# Altium PCB smart_charger_pcb.PcbDoc (part 1 of 2)
Units mm, origin at the board's own origin, x right, y up, seen from the top; angles counter-clockwise.
Board outline 250 x 183.13 mm, 4 copper layers (Top Layer, Ground, Power, Bottom Layer); 179 components, 118 nets, 581 pads, 0 vias.
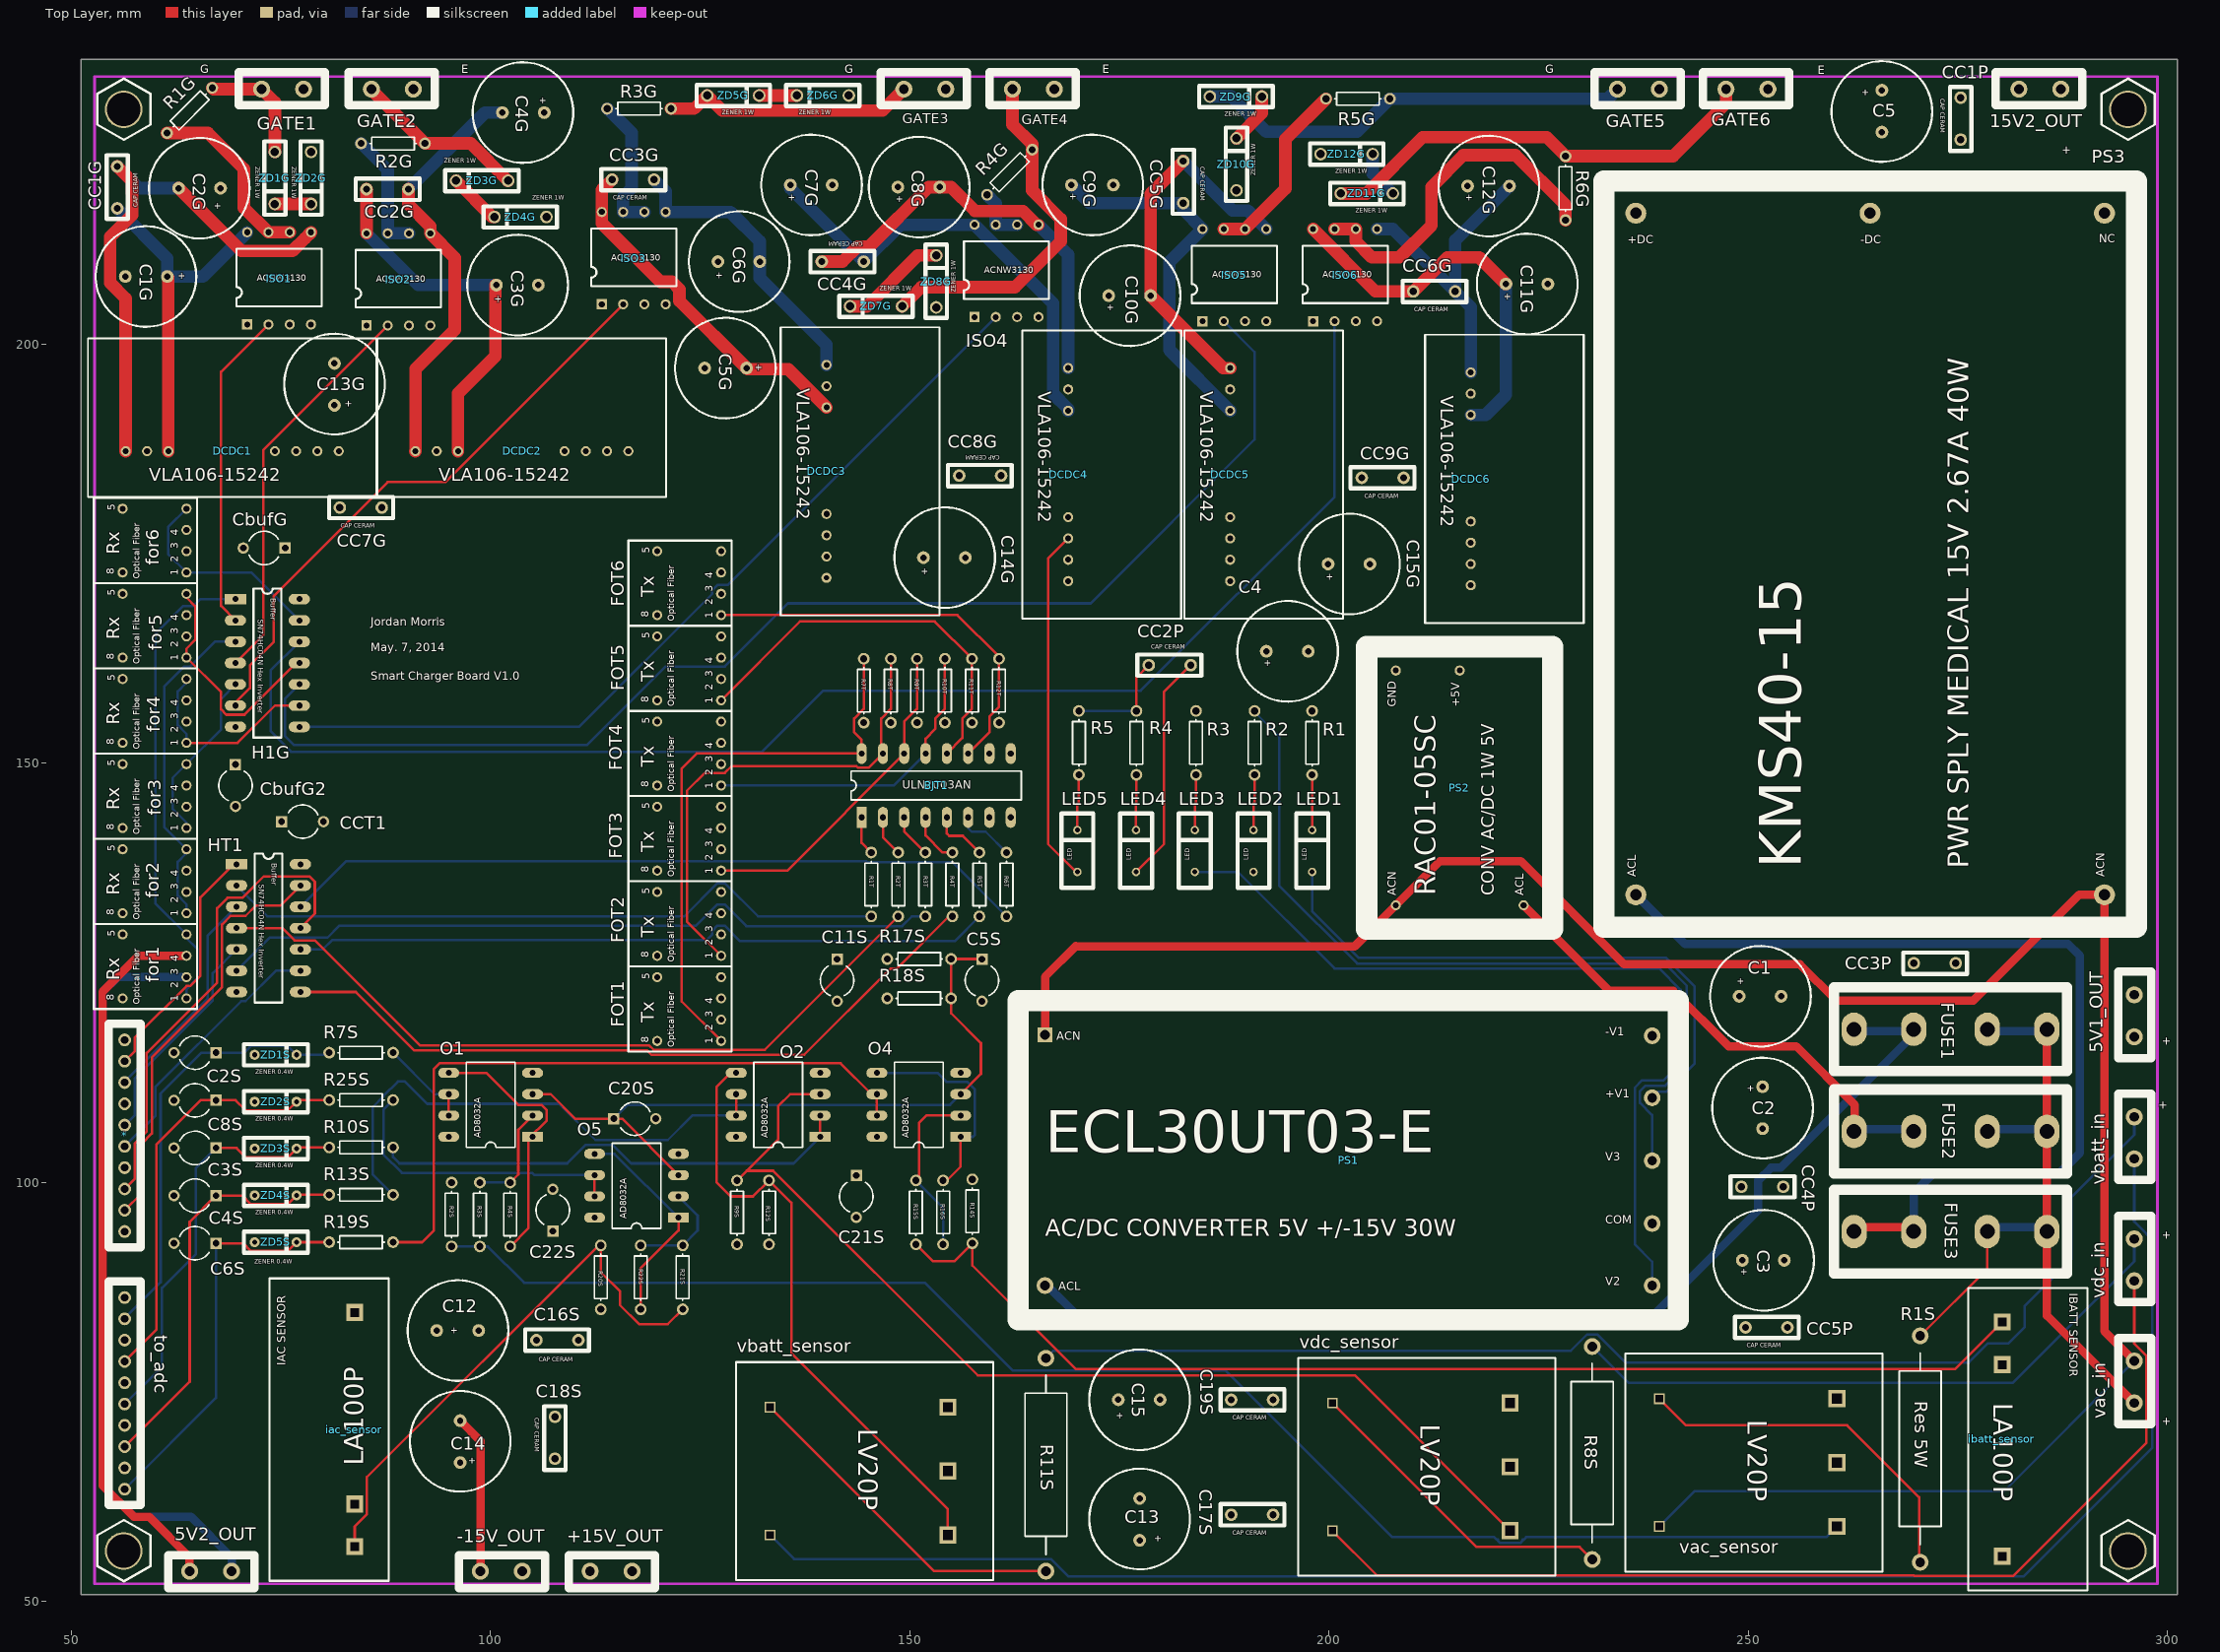
[diagram p0: Top Layer view]
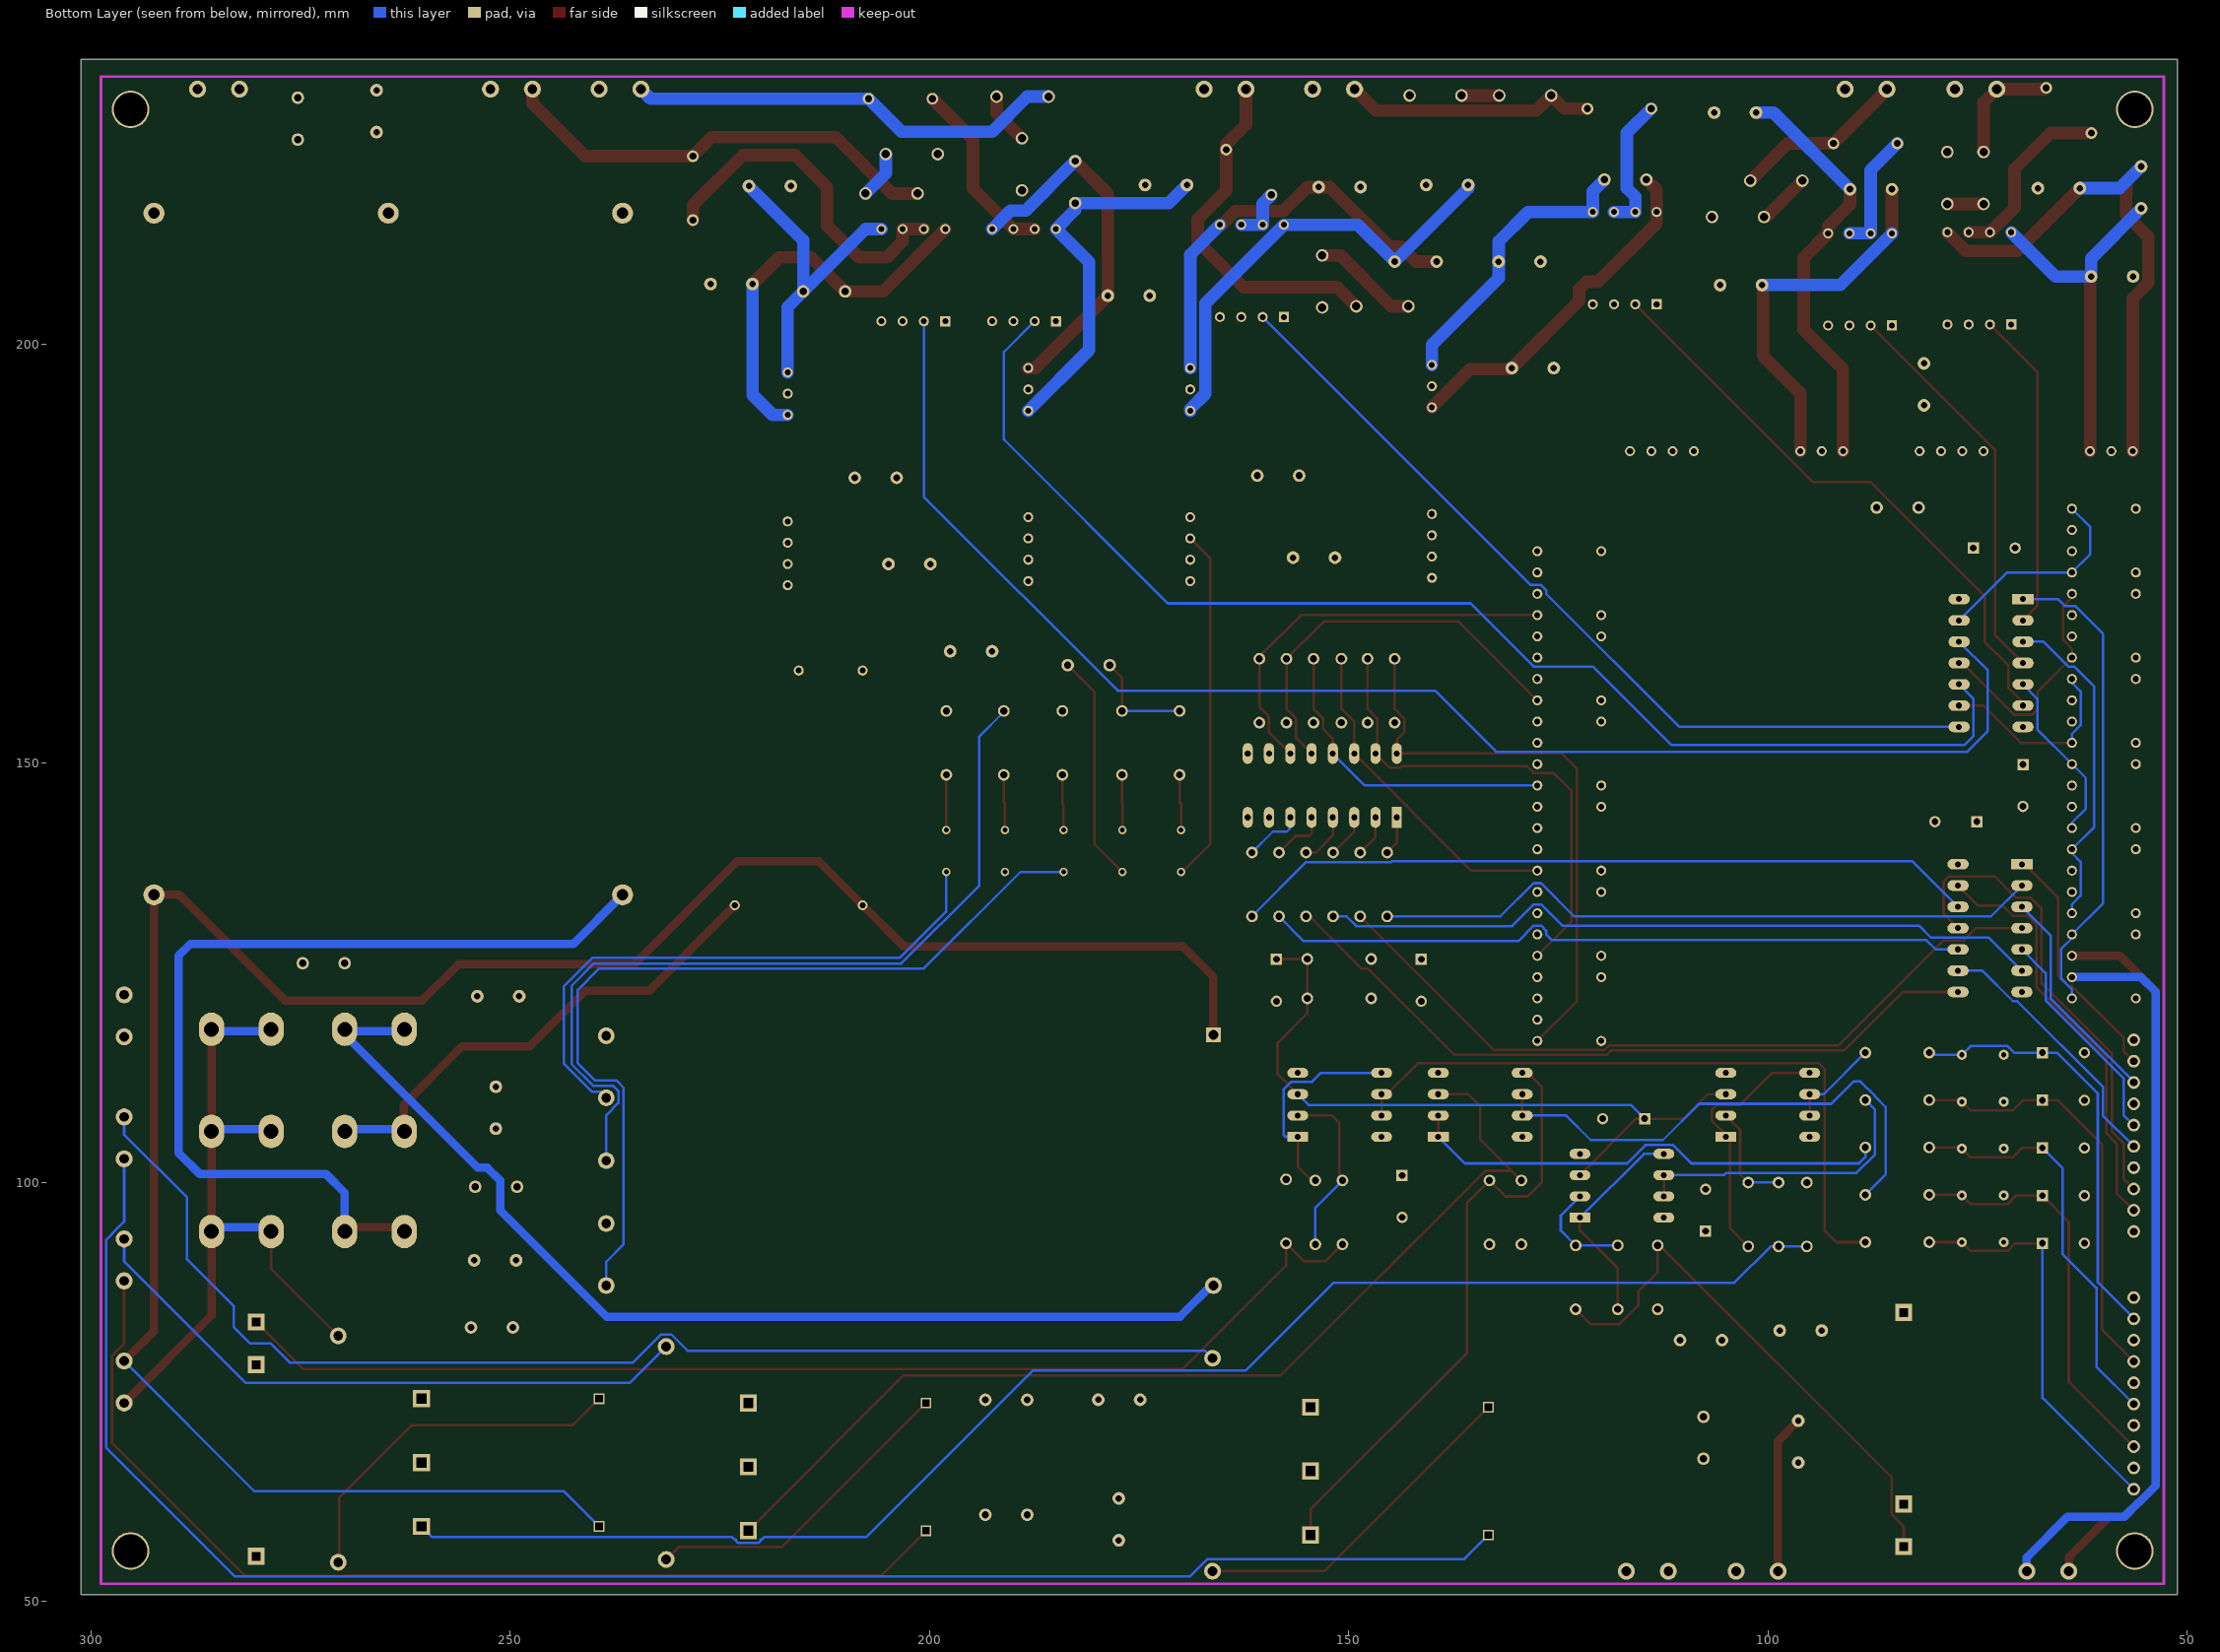
[diagram p1: Bottom Layer view, seen from below]
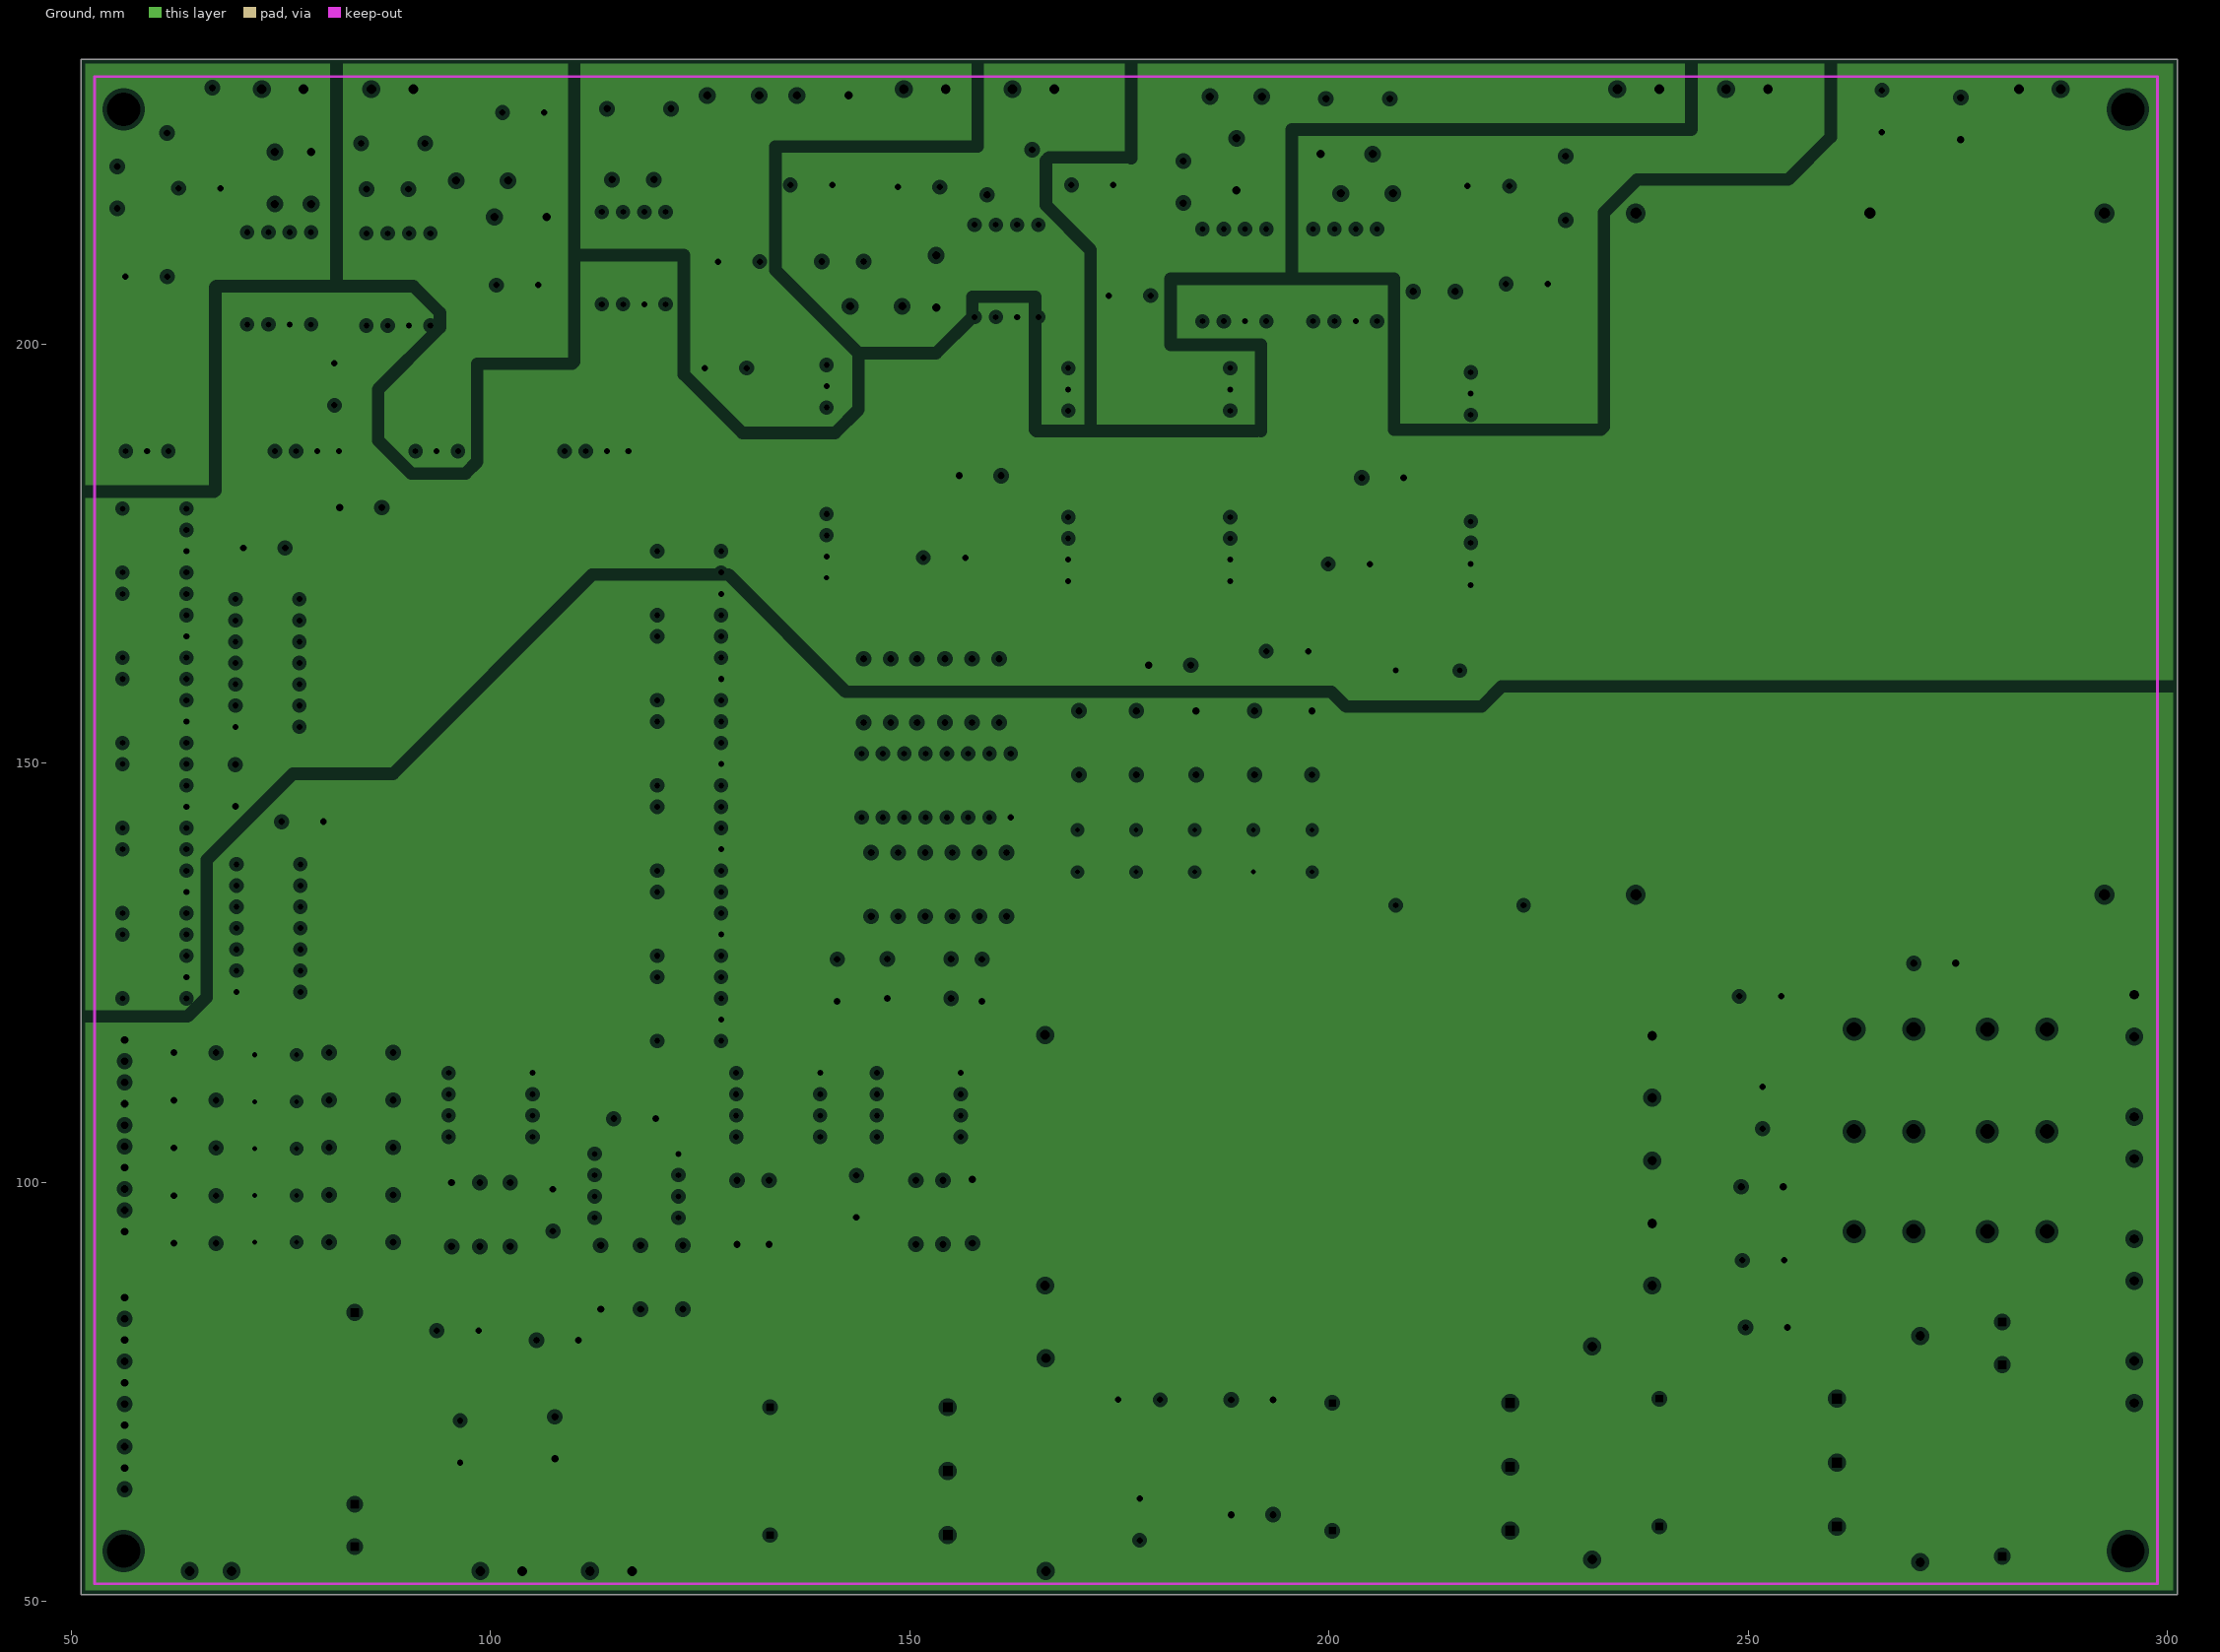
[diagram p2: Ground, clearances drawn from the general rule]
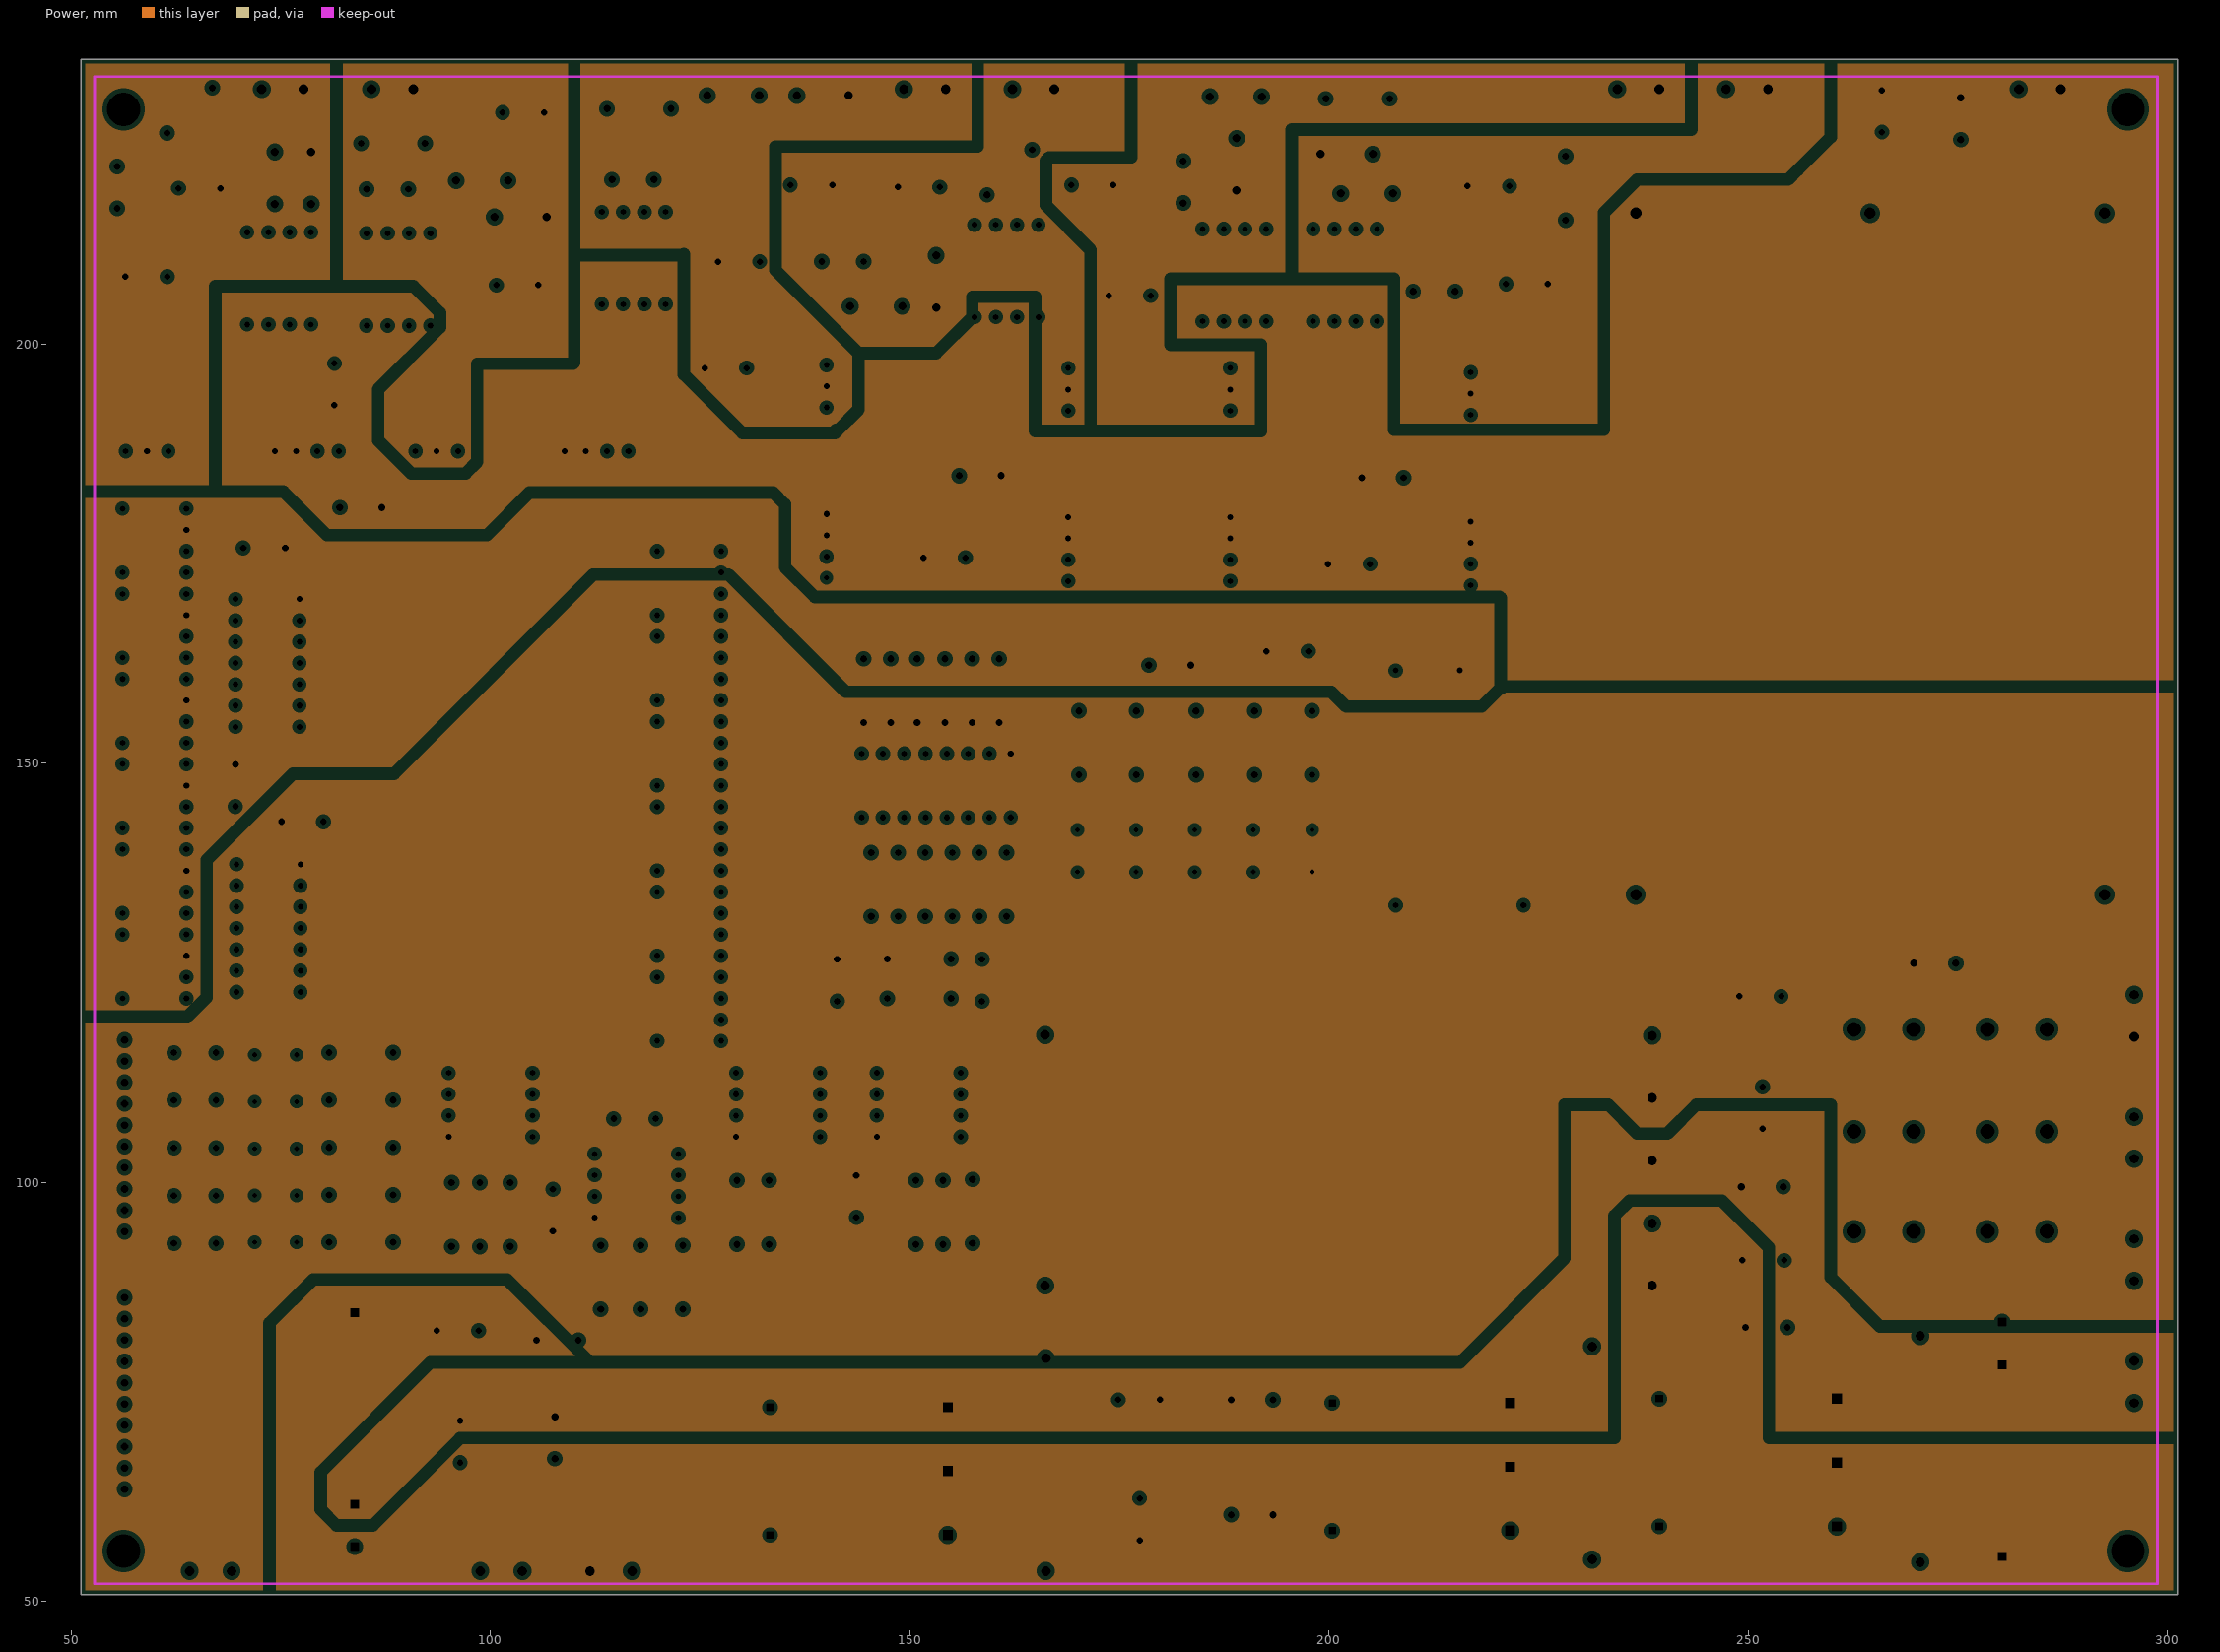
[diagram p3: Power, clearances drawn from the general rule]

## Layer stack, top to bottom
Top Layer: signal copper 0.0356
Dielectric: dielectric 0.32, FR-4, Dk 4.8
Ground: plane copper 0.0356, net (Multiple Nets)
Dielectric: dielectric 0.32, FR-4, Dk 4.8
Power: plane copper 0.0356, net (Multiple Nets)
Dielectric: dielectric 0.32, FR-4, Dk 4.8
Bottom Layer: signal copper 0.0356

## Board outline
51.181,50.8 301.181,50.8 301.181,233.934 51.181,233.934

## Design rules (kind name [scope] priority, off if disabled: settings)
Clearance [All] p1: gap=0.3
HoleSize [All] p1: absolutevalues=TRUE maxlimit=6 minlimit=0.025 maxpercent=80.000 minpercent=20.000
PlaneClearance [All] p1: clearance=0.508
PlaneConnect [All] p1: planeconnectstyle=Relief reliefexpansion=0.508 reliefentries=4 reliefconductorwidth=0.254 reliefairgap=0.254
PolygonConnect [All] p1: connectstyle=Relief reliefconductorwidth=0.254 reliefentries=4 polygonreliefangle="90 Angle"
RoutingVias [All] p1: holewidth=0.8 width=1.6 viastyle="Blind Buried (Adjacent Layers)" minholewidth=0.711 minwidth=1.27 maxholewidth=0.711 maxwidth=1.27
SilkToSilkClearance [All] p1: silktosilkclearance=0.2
SilkscreenOverComponentPads [All] p1: minsilkscreentomaskgap=0.2
SolderMaskExpansion [All] p1: expansion=0.102
Width [All] p1: maxlimit=5 minlimit=0.05 preferedwidth=0.3 minimp=50.000000 maximp=50.000000 favimp=50.000000
23 further rules are at their usual default settings.

## Classes and differential pairs
component class sensing_circuits: C2S C3S C4S C5S C6S C8S C11S C12 C13 C14 C15 C16S C17S C18S C19S C20S C21S C22S iac_sensor ibatt_sensor O1 O2 O4 O5 R1S R2S R3S R4S R7S R8S R9S R10S R11S R12S R13S R14S R15S R16S R17S R18S R19S R20S R21S R22S R25S to_adc vac_sensor vbatt_in vbatt_sensor vdc_in vdc_sensor ZD1S ZD2S ZD3S ZD4S ZD5S
component class gate_driver_array: C1G C2G C3G C4G C5G C6G C7G C8G C9G C10G C11G C12G C13G C14G C15G CbufG CbufG2 CC1G CC2G CC3G CC4G CC5G CC6G CC7G CC8G CC9G DCDC1 DCDC2 DCDC3 DCDC4 DCDC5 DCDC6 for1 for2 for3 for4 for5 for6 GATE1 GATE2 GATE3 GATE4 GATE5 GATE6 H1G ISO1 ISO2 ISO3 ISO4 ISO5 ISO6 R1G R2G R3G R4G R5G R6G ZD1G ZD2G ZD3G ZD4G ZD5G ZD6G ZD7G ZD8G ZD9G ZD10G ZD11G ZD12G
component class power_supplies: 5V1_OUT 5V2_OUT 15V2_OUT +15V_OUT -15V_OUT C1 C2 C3 C4 C5 CC1P CC2P CC3P CC4P CC5P FUSE1 FUSE2 FUSE3 LED1 LED2 LED3 LED4 LED5 PS1 PS2 PS3 R1 R2 R3 R4 R5 vac_in
component class fo_tx_array: * BJT1 CCT1 FOT1 FOT2 FOT3 FOT4 FOT5 FOT6 HT1 R1T R2T R3T R4T R5T R6T R7T R8T R9T R10T R11T R12T

## Components (designator, comment, footprint, x,y, rotation, side; value= is the part's Value field where it differs from the comment)
5V1_OUT "5MM_HOR_ENTRY" 5MM_HOR_ENTRY 296.037,117.348 r90 top
5V2_OUT "5MM_HOR_ENTRY" 5MM_HOR_ENTRY 64.135,53.594 r0 top
15V2_OUT "5MM_HOR_ENTRY" 5MM_HOR_ENTRY 287.274,230.378 r180 top
* "10PosConn" Conn_10Pos 56.388,106.807 r270 top
+15V_OUT "5MM_HOR_ENTRY" 5MM_HOR_ENTRY 111.887,53.594 r0 top
-15V_OUT "5MM_HOR_ENTRY" 5MM_HOR_ENTRY 98.806,53.594 r0 top
BJT1 "ULN2003AN" ULN2003AN 144.272,143.51 r90 top
C1 "C1" Cap_Pol_5mm 248.92,122.174 r0 top
C1G "Cap_Pol_5" Cap_Pol_5mm 61.468,208.026 r180 top
C2 "C1" Cap_Pol_5mm 251.714,111.379 r270 top
C2G "Cap_Pol_5" Cap_Pol_5mm 67.818,218.567 r180 top
C2S "C2" CAPR5-4X5 64.77,115.443 r180 top
C3 "C1" Cap_Pol_5mm 249.301,90.678 r0 top
C3G "Cap_Pol_5" Cap_Pol_5mm 100.711,207.01 r0 top
C3S "C3" CAPR5-4X5 64.77,104.076 r180 top
C4 "C1" Cap_Pol_5mm 192.532,163.322 r0 top
C4G "Cap_Pol_5" Cap_Pol_5mm 106.426,227.584 r180 top
C4S "C4" CAPR5-4X5 64.77,98.393 r180 top
C5 "C1" Cap_Pol_5mm 265.938,230.251 r270 top
C5G "Cap_Pol_5" Cap_Pol_5mm 130.556,197.104 r180 top
C5S "C5" CAPR5-4X5 158.623,124.079 r270 top
C6G "Cap_Pol_5" Cap_Pol_5mm 127.127,209.804 r0 top
C6S "C6" CAPR5-4X5 64.77,92.71 r180 top
C7G "Cap_Pol_5" Cap_Pol_5mm 135.763,218.948 r0 top
C8G "Cap_Pol_5" Cap_Pol_5mm 148.59,218.694 r0 top
C8S "C8" CAPR5-4X5 64.77,109.76 r180 top
C9G "Cap_Pol_5" Cap_Pol_5mm 169.291,218.948 r0 top
C10G "Cap_Pol_5" Cap_Pol_5mm 173.736,205.74 r0 top
C11G "Cap_Pol_5" Cap_Pol_5mm 221.107,207.137 r0 top
C11S "C11" CAPR5-4X5 141.351,124.079 r270 top
C12 "C12" Cap_Pol_5mm 93.599,82.296 r0 top
C12G "Cap_Pol_5" Cap_Pol_5mm 216.535,218.821 r0 top
C13 "C12" Cap_Pol_5mm 177.419,57.277 r90 top
C13G "Cap_Pol_5" Cap_Pol_5mm 81.407,192.659 r90 top
C14 "C12" Cap_Pol_5mm 96.393,66.548 r90 top
C14G "Cap_Pol_5" Cap_Pol_5mm 151.638,174.498 r0 top
C15 "C12" Cap_Pol_5mm 174.879,74.041 r0 top
C15G "Cap_Pol_5" Cap_Pol_5mm 199.898,173.736 r0 top
C16S "CAP_CERAM_5MM" CAP_CERAM_5MM 110.49,81.153 r180 top
C17S "CAP_CERAM_5MM" CAP_CERAM_5MM 188.341,60.325 r0 top
C18S "CAP_CERAM_5MM" CAP_CERAM_5MM 107.696,72.009 r270 top
C19S "CAP_CERAM_5MM" CAP_CERAM_5MM 188.341,74.041 r0 top
C20S "C20" CAPR5-4X5 117.221,107.569 r0 top
C21S "C21" CAPR5-4X5 143.637,98.298 r270 top
C22S "C22" CAPR5-4X5 107.442,96.647 r90 top
CbufG "Cap2" CAPR5-4X5 73.025,175.641 r180 top
CbufG2 "Cap2" CAPR5-4X5 69.596,147.32 r270 top
CC1G "CAP_CERAM_5MM" CAP_CERAM_5MM 55.499,216.154 r90 top
CC1P "CAP_CERAM_5MM" CAP_CERAM_5MM 275.336,229.362 r270 top
CC2G "CAP_CERAM_5MM" CAP_CERAM_5MM 85.217,218.44 r0 top
CC2P "CAP_CERAM_5MM" CAP_CERAM_5MM 183.515,161.671 r180 top
CC3G "CAP_CERAM_5MM" CAP_CERAM_5MM 114.506,219.583 r0 top
CC3P "CAP_CERAM_5MM" CAP_CERAM_5MM 269.748,126.111 r0 top
CC4G "CAP_CERAM_5MM" CAP_CERAM_5MM 144.526,209.804 r180 top
CC4P "CAP_CERAM_5MM" CAP_CERAM_5MM 249.174,99.441 r0 top
CC5G "CAP_CERAM_5MM" CAP_CERAM_5MM 182.626,216.789 r90 top
CC5P "CAP_CERAM_5MM" CAP_CERAM_5MM 249.682,82.677 r0 top
CC6G "CAP_CERAM_5MM" CAP_CERAM_5MM 210.058,206.248 r0 top
CC7G "CAP_CERAM_5MM" CAP_CERAM_5MM 82.042,180.467 r0 top
CC8G "CAP_CERAM_5MM" CAP_CERAM_5MM 160.909,184.277 r180 top
CC9G "CAP_CERAM_5MM" CAP_CERAM_5MM 208.915,184.023 r180 top
CCT1 "Cap2" CAPR5-4X5 77.597,143.002 r0 top
DCDC1 "HYBRIDIC_VLA106-15242" HYBRIDIC_VLA106-15242#1 56.515,187.198 r0 top
DCDC2 "HYBRIDIC_VLA106-15242" HYBRIDIC_VLA106-15242#1 91.059,187.198 r0 top
DCDC3 "HYBRIDIC_VLA106-15242" HYBRIDIC_VLA106-15242#2 140.081,197.485 r270 top
DCDC4 "HYBRIDIC_VLA106-15242" HYBRIDIC_VLA106-15242#1 168.91,197.104 r270 top
DCDC5 "HYBRIDIC_VLA106-15242" HYBRIDIC_VLA106-15242#1 188.214,197.104 r270 top
DCDC6 "HYBRIDIC_VLA106-15242" HYBRIDIC_VLA106-15242#1 216.916,196.596 r270 top
for1 "AVAGO_HFBR-2521Z" AVAGO_HFBR-2521Z 56.134,121.92 r0 top
for2 "AVAGO_HFBR-2521Z" AVAGO_HFBR-2521Z 56.134,132.08 r0 top
for3 "AVAGO_HFBR-2521Z" AVAGO_HFBR-2521Z 56.134,142.24 r0 top
for4 "AVAGO_HFBR-2521Z" AVAGO_HFBR-2521Z 56.134,152.4 r0 top
for5 "AVAGO_HFBR-2521Z" AVAGO_HFBR-2521Z 56.134,162.56 r0 top
for6 "AVAGO_HFBR-2521Z" AVAGO_HFBR-2521Z 56.134,172.72 r0 top
FOT1 "AVAGO_HFBR-1521Z" AVAGO_HFBR-1521Z 127.508,124.46 r180 top
FOT2 "AVAGO_HFBR-1521Z" AVAGO_HFBR-1521Z 127.508,134.62 r180 top
FOT3 "AVAGO_HFBR-1521Z" AVAGO_HFBR-1521Z 127.508,144.78 r180 top
FOT4 "AVAGO_HFBR-1521Z" AVAGO_HFBR-1521Z 127.508,154.94 r180 top
FOT5 "AVAGO_HFBR-1521Z" AVAGO_HFBR-1521Z 127.508,165.1 r180 top
FOT6 "AVAGO_HFBR-1521Z" AVAGO_HFBR-1521Z 127.508,175.26 r180 top
FUSE1 "fuse < 5A" "Fuse < 5A" 285.623,118.237 r180 top
FUSE2 "fuse < 5A" "Fuse < 5A" 285.623,106.045 r180 top
FUSE3 "fuse < 5A" "Fuse < 5A" 285.623,94.107 r180 top
GATE1 "5MM_HOR_ENTRY" 5MM_HOR_ENTRY 77.724,230.378 r180 top
GATE2 "5MM_HOR_ENTRY" 5MM_HOR_ENTRY 90.805,230.378 r180 top
GATE3 "5MM_HOR_ENTRY" 5MM_HOR_ENTRY 154.305,230.378 r180 top
GATE4 "5MM_HOR_ENTRY" 5MM_HOR_ENTRY 167.259,230.378 r180 top
GATE5 "5MM_HOR_ENTRY" 5MM_HOR_ENTRY 239.395,230.378 r180 top
GATE6 "5MM_HOR_ENTRY" 5MM_HOR_ENTRY 252.349,230.378 r180 top
H1G "TI_SN74HC04N" SN74HC04N 69.596,169.545 r0 top
HT1 "TI_SN74HC04N" SN74HC04N 69.723,137.922 r0 top
iac_sensor "LA100P" LA100P 83.82,56.515 r90 top
ibatt_sensor "LA100P" LA100P 280.289,83.312 r270 top
ISO1 "AVAGO_ACNW3130" AVAGO_ACNW3130 70.993,202.311 r90 top
ISO2 "AVAGO_ACNW3130" AVAGO_ACNW3130 85.217,202.184 r90 top
ISO3 "AVAGO_ACNW3130" AVAGO_ACNW3130 113.284,204.724 r90 top
ISO4 "AVAGO_ACNW3130" AVAGO_ACNW3130 157.734,203.2 r90 top
ISO5 "AVAGO_ACNW3130" AVAGO_ACNW3130 184.912,202.692 r90 top
ISO6 "AVAGO_ACNW3130" AVAGO_ACNW3130 198.12,202.692 r90 top
LED1 "LED" LED 198,137 r90 top
LED2 "LED" LED 191,137 r90 top
LED3 "LED" LED 184,137 r90 top
LED4 "LED" LED 177,137 r90 top
LED5 "LED" LED 170,137 r90 top
O1 "AD8032A" AD8032A 105.029,105.41 r180 top
O2 "AD8032A" AD8032A 139.319,105.41 r180 top
O4 "AD8032A" AD8032A 156.083,105.41 r180 top
O5 "AD8032A" AD8032A 122.428,95.758 r180 top
PS1 "AC/DC CONVERTER 5V +/-15V 30W" "AC/DC CONVERTER 5V +/-15V 30W" 162.941,83.566 r0 top
PS2 "CONV AC/DC 1W 5V" "CONV AC/DC 1W 5V" 226.695,130.175 r90 top
PS3 "PWR SPLY MEDICAL 15V 2.67A 40W" "PWR SPLY MEDICAL 15V 2.67A 40W" 296.291,130.429 r90 top
R1 "Res1" AXIAL-0.3 197.993,152.4 r270 top
R1G "Res1" AXIAL-0.3 64.135,227.838 r45 top
R1S "R1" Res_Vishay_5W#1 270.51,81.661 r270 top
R1T "" AXIAL-0.3 145.415,135.509 r90 top
R2 "Res1" AXIAL-0.3 191.135,152.4 r270 top
R2G "Res1" AXIAL-0.3 88.392,223.901 r0 top
R2S "R2" AXIAL-0.3 95.377,96.139 r270 top
R2T "" AXIAL-0.3 148.641,135.509 r90 top
R3 "Res1" AXIAL-0.3 184.15,152.4 r270 top
R3G "Res1" AXIAL-0.3 117.729,228.044 r0 top
R3S "R3" AXIAL-0.3 98.742,96.139 r270 top
R3T "" AXIAL-0.3 151.867,135.509 r90 top
R4 "Res1" AXIAL-0.3 177.038,152.4 r270 top
R4G "Res1" AXIAL-0.3 161.925,220.472 r45 top
R4S "R4" AXIAL-0.3 102.362,96.139 r90 top
R4T "" AXIAL-0.3 155.092,135.509 r90 top
R5 "Res1" AXIAL-0.3 170.18,152.4 r90 top
R5G "Res1" AXIAL-0.3 203.454,229.235 r0 top
R5T "" AXIAL-0.3 158.318,135.509 r90 top
R6G "Res1" AXIAL-0.3 228.219,218.567 r90 top
R6T "" AXIAL-0.3 161.544,135.509 r90 top
R7S "R7" AXIAL-0.3 84.582,115.443 r0 top
R7T "Res1" AXIAL-0.3 144.526,158.623 r90 top
R8S "R8" Res_Vishay_5W#2 231.394,80.391 r270 top
R8T "Res1" AXIAL-0.3 147.752,158.623 r90 top
R9S "R9" AXIAL-0.3 129.413,96.393 r90 top
R9T "Res1" AXIAL-0.3 150.876,158.623 r90 top
R10S "R10" AXIAL-0.3 84.582,104.14 r180 top
R10T "Res1" AXIAL-0.3 154.203,158.623 r90 top
R11S "R11" Res_Vishay_5W#2 166.243,78.994 r270 top
R11T "Res1" AXIAL-0.3 157.429,158.623 r90 top
R12S "R12" AXIAL-0.3 133.223,96.393 r90 top
R12T "Res1" AXIAL-0.3 160.655,158.623 r90 top
R13S "R13" AXIAL-0.3 84.582,98.489 r180 top
R14S "R14" AXIAL-0.3 157.48,96.52 r270 top
R15S "R15" AXIAL-0.3 150.749,96.393 r270 top
R16S "R16" AXIAL-0.3 153.987,96.393 r270 top
R17S "R17" AXIAL-0.3 151.13,126.619 r180 top
R18S "R18" AXIAL-0.3 151.13,121.92 r180 top
R19S "R19" AXIAL-0.3 84.582,92.837 r0 top
R20S "R20" AXIAL-0.3 113.157,88.646 r90 top
R21S "R21" AXIAL-0.3 122.936,88.646 r270 top
R22S "R22" AXIAL-0.3 117.919,88.646 r90 top
R25S "R25" AXIAL-0.3 84.582,109.791 r0 top
to_adc "10PosConn" Conn_10Pos 56.388,76.073 r270 top
vac_in "5MM_HOR_ENTRY" 5MM_HOR_ENTRY 296.037,73.66 r90 top
vac_sensor "LV20P" LV20P 239.395,74.168 r270 top
vbatt_in "5MM_HOR_ENTRY" 5MM_HOR_ENTRY 296.037,102.785 r90 top
vbatt_sensor "LV20P" LV20P 133.35,73.152 r270 top
vdc_in "5MM_HOR_ENTRY" 5MM_HOR_ENTRY 296.037,88.223 r90 top
vdc_sensor "LV20P" LV20P 200.406,73.66 r270 top
ZD1G "ZENER_1W" ZENER_1W 74.295,222.885 r270 top
ZD1S "ZENER_0.4W" ZENER400mW 71.882,115.189 r0 top
ZD2G "ZENER_1W" ZENER_1W 78.613,222.885 r270 top
ZD2S "ZENER_0.4W" ZENER400mW 71.882,109.601 r0 top
ZD3G "ZENER_1W" ZENER_1W 102.108,219.456 r180 top
ZD3S "ZENER_0.4W" ZENER400mW 71.882,104.013 r0 top
ZD4G "ZENER_1W" ZENER_1W 106.68,215.138 r180 top
ZD4S "ZENER_0.4W" ZENER400mW 71.882,98.425 r0 top
ZD5G "ZENER_1W" ZENER_1W 125.857,229.616 r0 top
ZD5S "ZENER_0.4W" ZENER400mW 71.882,92.837 r0 top
ZD6G "ZENER_1W" ZENER_1W 142.748,229.616 r180 top
ZD7G "ZENER_1W" ZENER_1W 149.098,204.47 r180 top
ZD8G "ZENER_1W" ZENER_1W 153.162,204.343 r90 top
ZD9G "ZENER_1W" ZENER_1W 185.801,229.489 r0 top
ZD10G "ZENER_1W" ZENER_1W 188.976,218.313 r90 top
ZD11G "ZENER_1W" ZENER_1W 201.422,217.932 r0 top
ZD12G "ZENER_1W" ZENER_1W 199.009,222.631 r0 top

## Footprints (in the part's own frame and the unit in brackets; to place one, negate y for a bottom-side part, rotate by r counter-clockwise, add the part's x,y. Pads: shape width x height; smd on the part's side, far side on the other; paste and mask are expansions set on the pad)
5MM_HOR_ENTRY [mil]
  round 80 hole 45.28: 1(0,0) 2(196.85,0)
  silkscreen extent -100,-80 305,75
"AC/DC CONVERTER 5V +/-15V 30W" [mm]
  round 2 hole 1.15: 1(75.6,33.9) 2(75.6,26.5) 3(75.6,19) 4(75.6,11.5) 5(75.6,4.1) ACL(3.2,4.1)
  rect 1.8x1.8 hole 1.15: ACN(3.2,34)
  silkscreen extent 0,0 78.7,38.1
AD8032A [mm]
  rect 2.5x1.2 hole 0.711: 1(0,0)
  oval 2.5x1.2 hole 0.711: 2(0,-2.54) 3(0,-5.08) 4(0,-7.62) 5(10,-7.62) 6(10,-5.08) 7(10,-2.54) 8(10,0)
  silkscreen extent 2.08,-8.89 7.91,1.27
AVAGO_ACNW3130 [mm]
  rect 1.22x1.2 hole 0.711: 1(0,0)
  round 1.2 hole 0.711: 2(0,-2.54) 3(0,-5.08) 4(0,-7.62) 5(11,-7.62) 6(11,-5.08) 7(11,-2.54) 8(11,0)
  silkscreen extent 2.16,-8.89 9.02,1.27
AVAGO_HFBR-1521Z [mm]
  round 1.2 hole 0.711: 1(0,7.62) 2(0,5.08) 3(0,2.54) 4(0,0) 5(7.62,0) 8(7.62,7.62)
  silkscreen extent -1.27,-1.27 11.05,8.89
AVAGO_HFBR-2521Z [mm]
  round 1.2 hole 0.711: 1(7.62,0) 2(7.62,2.54) 3(7.62,5.08) 4(7.62,7.62) 5(0,7.62) 8(0,0)
  silkscreen extent -3.43,-1.27 8.89,8.89
AXIAL-0.3 [mm] "Axial Device, Thru-Hole; 2 Leads; 0.3 in Pin Spacing"
  round 1.4 hole 0.85: 1(-3.81,0) 2(3.81,0)
  silkscreen extent -2.77,-0.76 2.77,0.76
CAP_CERAM_5MM [mm]
  round 1.5 hole 0.85: 1(0,0) 2(5,0)
  silkscreen extent -1.27,-1.27 6.35,1.27
Cap_Pol_5mm [mil]
  round 60 hole 30: 1(0,0) 2(196.85,0)
  silkscreen extent -136,-236 336,236
CAPR5-4X5 [mm] "Capacitor; 2 Leads"
  rect 1.35x1.35 hole 0.8: 1(-2.5,0)
  round 1.35 hole 0.8: 2(2.5,0)
  silkscreen extent -1.69,-2 1.82,2
Conn_10Pos [mil]
  round 60 hole 35.43: 1(-400,0) 2(-300,0) 3(-200,0) 4(-100,0) 5(0,0) 6(100,0) 7(200,0) 8(300,0) 9(400,0) 10(500,0)
  silkscreen extent -475,-75 575,75
"CONV AC/DC 1W 5V" [mm]
  round 1.2 hole 0.711: 1(2.85,18.72) 2(2.85,3.48) 3(30.85,18.72) 4(30.85,11.1)
  silkscreen extent 0,0 33.7,22.2
"Fuse < 5A" [mm]
  oval 3x4 hole 1.75: 1(0,0) 1(7.11,0) 2(15.89,0) 2(23,0)
  silkscreen extent -2.41,-5 25.4,5
HYBRIDIC_VLA106-15242#1 [mm]
  round 1.2 hole 0.711: 1(0,0) 2(2.54,0) 3(5.08,0) 8(17.78,0) 9(20.32,0) 10(22.86,0) 11(25.4,0)
  silkscreen extent -4.5,-5.49 29.9,13.49
HYBRIDIC_VLA106-15242#2 [mm]
  round 1.2 hole 0.711: 1(0,0) 2(2.54,0) 3(5.08,0) 8(17.78,0) 9(20.32,0) 10(22.86,0)
  round 1.2 hole 0.6: 11(25.4,0)
  silkscreen extent -4.5,-5.49 29.9,13.49
LA100P [mil]
  rect 80x80 hole 39.37 square: +(1100,0) -(200,0) M(0,0)
  silkscreen extent -160,-160 1260,400
LED [mm]
  round 1 hole 0.6: 1(0,0) 2(5,0)
  silkscreen extent -1.91,-1.91 6.98,1.9
LV20P [mil]
  rect 80x80 hole 45.28 square: +15V(300,834.65) -15V(0,834.65) M(600,834.65)
  rect 50x50 hole 33.46 square: HV+(0,0) HV-(600,0)
  silkscreen extent -212,-160 812,1047
"PWR SPLY MEDICAL 15V 2.67A 40W" [mm]
  round 2.5 hole 1.35: 1(3.85,59.69) 2(3.85,3.81) 3(85.15,59.69) 5(85.15,31.75) 7(85.15,3.81)
  silkscreen extent 0,0 89,63.5
Res_Vishay_5W#1 [mm]
  round 2 hole 1.15: 1(0,0) 2(27,0)
  silkscreen extent 2,-2.5 24.91,2.5
Res_Vishay_5W#2 [mm]
  round 2 hole 1.15: 1(0,0) 2(25.4,0)
  silkscreen extent 2,-2.5 23.4,2.5
SN74HC04N [mil]
  rect 100x50 hole 28: 1A(0,0)
  oval 100x50 hole 28: 1Y(0,-100) 2A(0,-200) 2Y(0,-300) 3A(0,-400) 3Y(0,-500) 4A(300,-500) 4Y(300,-600) 5A(300,-300) 5V(300,0) 5Y(300,-400) 6A(300,-100) 6Y(300,-200) GND(0,-600)
  silkscreen extent 85,-650 215,50
ULN2003AN [mm]
  rect 2.5x1.2 hole 0.711: 1(0,0)
  oval 2.5x1.2 hole 0.711: 2(0,-2.54) 3(0,-5.08) 4(0,-7.62) 5(0,-10.16) 6(0,-12.7) 7(0,-15.24) 8(0,-17.78) 9(7.62,-17.78) 10(7.62,-15.24) 11(7.62,-12.7) 12(7.62,-10.16) 13(7.62,-7.62) 14(7.62,-5.08) 15(7.62,-2.54) 16(7.62,0)
  silkscreen extent 2.08,-19.05 5.54,1.27
ZENER400mW [mm]
  round 1.2 hole 0.6: 1(0,0) 2(5,0)
  silkscreen extent -1.27,-1.27 6.35,1.27
ZENER_1W [mm]
  round 1.5 hole 1: 1(0,0) 2(6.2,0)
  silkscreen extent -1.27,-1.27 7.49,1.27

## Part data
C1 C2 C3 C4 C5 C12 C13 C14 C15: library part Cap_Pol_5
C2S C3S C4S C5S C6S C8S C11S C20S C21S C22S: library part Cap2, "Capacitor"
CbufG CbufG2 CCT1: "Capacitor"
DCDC1 DCDC2 DCDC3 DCDC4 DCDC5 DCDC6: "Isolated DC/DC Converter"
for1 for2 for3 for4 for5 for6: "Optical Fiber Receiver"
FOT1 FOT2 FOT3 FOT4 FOT5 FOT6: "Optical Fiber Transmitter"
H1G HT1: "Hex Inverter 5V"
ISO1 ISO2 ISO3 ISO4 ISO5 ISO6: "IGBT Gate Drive Optocoupler"
R1 R1G R2 R2G R3 R3G R4 R4G R5 R5G R6G R7T R8T R9T R10T R11T R12T: "Resistor"
R1S R8S R11S: library part Res_Vishay_5W
R1T R2S R2T R3S R3T R4S R4T R5T R6T R7S R9S R10S R12S R13S R14S R15S R16S R17S R18S R19S R20S R21S R22S R25S: library part Res1, "Resistor"

## Free pads (board coordinates)
  round 4.5 hole 4 unplated mask-2.5: 1(295.275,56.007) 2(295.275,227.965) 3(56.261,227.965) 4(56.261,56.007)

## Nets (pads, with @x,y where several pads share a name; then routed paths per layer and width w, separated by ;. In a path a pad name is that pad's centre, name@x,y a point inside that pad or via, vN(x,y) a via of type N, cw(c..) or ccw(c..) an arc to the next point about the centre after c; other vN are vias at no path point)
5V1: 5V1_OUT.1 BJT1.9 C1.1 C11S.1 C21S.1 C22S.1 CC3P.1 CCT1.1 HT1.5V LED1.1 O1.8 O2.8 O4.8 O5.8 PS1.2 R7T.1 R8T.1 R9T.1 R10T.1 R11T.1 R12T.1 R17S.2 | length 69.9
  Bottom Layer w0.3: LED1.1@198,137 198,132.327 203.581,126.746 240.203,126.746 243.586,123.363 243.586,114.127 240.238,110.779 239.254,110.779 PS1.2@238.541,110.066
5V2: 5V2_OUT.1 C4.1 CbufG2.1 CbufG.1 CC2P.1 for1.3 for2.3 for3.3 for4.3 for5.3 for6.3 H1G.5V LED4.1 PS2.4 | length 113.6
  Top Layer w0.3: LED4.1@177,137 180.34,140.34 180.34,158.496 CC2P.1@183.515,161.671
  Top Layer w1: for1.3@63.754,127 58.039,127 53.75,122.711 53.75,63.802 57.481,60.071 59.309,60.071 64.135,55.245 5V2_OUT.1@64.135,53.594
15V2: 15V2_OUT.1 C5.1 C13G.1 C14G.1 C15G.1 CC1P.1 CC7G.2 CC8G.1 CC9G.2 DCDC1.8 DCDC1.9 DCDC2.8 DCDC2.9 DCDC3.8 DCDC3.9 DCDC4.8 DCDC4.9 DCDC5.8 DCDC5.9 DCDC6.8 DCDC6.9 LED5.1 PS3.3 | length 42.3
  Top Layer w0.3: DCDC4.9@168.91,176.784 166.497,174.371 166.497,140.335 169.832,137 LED5.1@170,137
+15V: +15V_OUT.1 C3.1 C12.1 C13.1 C16S.2 C17S.2 CC5P.1 iac_sensor.+ ibatt_sensor.+ LED3.1 PS1.5 vac_sensor.+15V vbatt_sensor.+15V vdc_sensor.+15V | length 103.6
  Bottom Layer w0.3: LED3.1@184,137 189.136,137 200.66,125.476 239.395,125.476 241.935,122.936 241.935,114.173 239.903,112.141 237.363,112.141 236.474,111.252 236.474,92.583 238.541,90.516 PS1.5@238.541,87.666
-15V: -15V_OUT.1 C2.2 C14.2 C15.2 C18S.1 C19S.1 CC4P.1 iac_sensor.- ibatt_sensor.- PS1.3 R2.1 vac_sensor.-15V vbatt_sensor.-15V vdc_sensor.-15V | length 119.6
  Top Layer w1: C14.2@96.393,71.548 98.806,69.135 -15V_OUT.1@98.806,53.594
  Bottom Layer w0.3: R2.1@191.135,156.083 194.056,153.162 194.056,135.382 203.362,126.076 240.025,126.076 242.662,123.439 242.662,114.051 240.127,111.516 237.754,111.516 237.091,110.853 237.091,109.465 238.541,108.015 PS1.3@238.541,102.566
EM1: C1G.2 C2G.1 DCDC1.2 GATE1.1 ZD2G.1
EM2: C3G.2 C4G.1 DCDC2.2 GATE2.1 ZD4G.1
EM3: C5G.2 C6G.1 DCDC3.2 GATE3.1 ZD6G.1
EM4: C7G.2 C8G.1 DCDC4.2 GATE4.1 ZD8G.1
EM5: C9G.2 C10G.1 DCDC5.2 GATE5.1 ZD10G.1
EM6: C11G.2 C12G.1 DCDC6.2 GATE6.1 ZD12G.1
GND1: 5V1_OUT.2 *.1 *.4 *.7 *.10 +15V_OUT.2 -15V_OUT.2 BJT1.8 C1.2 C2.1 C2S.2 C3.2 C3S.2 C4S.2 C5S.2 C6S.2 C8S.2 C11S.2 C12.2 C13.2 C14.1 C15.1 C16S.1 C17S.1 C18S.2 C19S.2 C20S.2 C21S.2 C22S.2 CC3P.2 CC4P.2 CC5P.2 CCT1.2 FOT1.2 FOT2.2 FOT3.2 FOT4.2 FOT5.2 FOT6.2 HT1.GND LED2.1 O1.4 O2.4 O4.4 O5.4 PS1.1 PS1.4 R1.1 R2S.1 R3.1 R9S.1 R12S.1 R14S.1 R18S.2 R20S.1 to_adc.1 to_adc.3 to_adc.5 to_adc.7 to_adc.9 ZD1S.1 ZD2S.1 ZD3S.1 ZD4S.1 ZD5S.1
GND2: 5V2_OUT.2 15V2_OUT.2 C4.2 C5.2 C13G.2 C14G.2 C15G.2 CbufG2.2 CbufG.2 CC1P.2 CC2P.2 CC7G.1 CC8G.2 CC9G.1 DCDC1.10 DCDC1.11 DCDC2.10 DCDC2.11 DCDC3.10 DCDC3.11 DCDC4.10 DCDC4.11 DCDC5.10 DCDC5.11 DCDC6.10 DCDC6.11 for1.2 for2.2 for3.2 for4.2 for5.2 for6.2 H1G.GND ISO1.3 ISO2.3 ISO3.3 ISO4.3 ISO5.3 ISO6.3 PS2.3 PS3.5 R4.1 R5.2 | length 103.1
  Top Layer w0.3: R4.1@177.038,156.21 177.038,160.194 CC2P.2@178.515,161.671
  Bottom Layer w0.3: R5.2@170.18,156.21 R4.1@177.038,156.21
  Bottom Layer w1: for1.2@63.754,124.46 55.528,124.46 53.75,122.682 53.75,63.802 55.741,61.811 55.791,61.811 57.531,60.071 64.309,60.071 69.135,55.245 5V2_OUT.2@69.135,53.594
Net*_2: *.2 HT1.1A | length 29.5
  Top Layer w0.3: *.2@56.388,114.427 57.6,115.639 57.6,117.251 63.759,123.41 64.189,123.41 65.405,124.626 65.405,133.985 69.342,137.922 HT1.1A@69.723,137.922
Net*_3: *.3 HT1.2A | length 26.5
  Bottom Layer w0.3: *.3@56.388,111.887 56.388,112.014 66.294,121.92 66.294,129.413 HT1.2A@69.723,132.842
Net*_5: *.5 HT1.3A | length 26.5
  Bottom Layer w0.3: *.5@56.388,106.807 57.6,108.019 57.6,112.377 66.894,121.671 66.894,124.933 HT1.3A@69.723,127.762
Net*_6: *.6 HT1.4A | length 31.6
  Bottom Layer w0.3: *.6@56.388,104.267 60.071,107.95 60.071,111.379 70.289,121.597 70.807,121.597 74.432,125.222 HT1.4A@77.343,125.222
Net*_8: *.8 HT1.5A | length 57.8
  Top Layer w0.3: *.8@56.388,99.187 57.6,100.399 57.6,104.63 59.02,106.05 59.02,115.408 67.403,123.791 67.403,132.691 68.639,133.927 70.437,133.927 72.977,136.467 78.427,136.467 79.063,135.831 79.063,132.022 HT1.5A@77.343,130.302
Net*_9: *.9 HT1.6A | length 50.2
  Top Layer w0.3: *.9@56.388,96.647 58.42,98.679 58.42,104.602 59.62,105.802 59.62,114.865 68.003,123.248 68.003,130.751 69.009,131.757 70.807,131.757 72.019,132.969 74.93,132.969 HT1.6A@77.343,135.382
NetBJT1_1: BJT1.1 R1T.2 | length 4.7
  Top Layer w0.3: BJT1.1@144.272,143.51 144.272,140.462 R1T.2@145.415,139.319
NetBJT1_2: BJT1.2 R2T.2 | length 4.9
  Top Layer w0.3: BJT1.2@146.812,143.51 146.812,141.148 R2T.2@148.641,139.319
NetBJT1_3: BJT1.3 R3T.2 | length 5.2
  Top Layer w0.3: BJT1.3@149.352,143.51 149.352,141.834 R3T.2@151.867,139.319
NetBJT1_4: BJT1.4 R4T.2 | length 6.2
  Top Layer w0.3: BJT1.4@151.892,143.51 151.892,141.351 153.924,139.319 R4T.2@155.092,139.319
NetBJT1_5: BJT1.5 R5T.2 | length 6.8
  Top Layer w0.3: BJT1.5@154.432,143.51 154.432,141.58 154.707,141.304 156.333,141.304 R5T.2@158.318,139.319
NetBJT1_6: BJT1.6 R6T.2 | length 7.1
  Bottom Layer w0.3: BJT1.6@156.972,143.51 156.972,142.24 157.404,141.808 159.055,141.808 R6T.2@161.544,139.319
NetBJT1_11: BJT1.11 FOT6.1 R12T.2 | length 48.3
  Top Layer w0.3: FOT6.1@127.508,167.64 155.702,167.64 160.655,162.687 160.655,156.693 159.505,155.543 159.505,153.663 BJT1.11@156.972,151.13
NetBJT1_12: BJT1.12 FOT5.1 R11T.2 | length 48.2
  Top Layer w0.3: FOT5.1@127.508,157.48 136.906,166.878 152.984,166.878 R11T.2@157.429,162.433 157.429,156.439 156.279,155.289 156.279,152.977 BJT1.12@154.432,151.13
NetBJT1_13: BJT1.13 FOT4.1 R10T.2 | length 38.2
  Top Layer w0.3: BJT1.13@151.892,151.13 151.892,152.908 153.053,154.069 153.053,155.289 154.203,156.439 R10T.2@154.203,162.433
  Bottom Layer w0.3: FOT4.1@127.508,147.32 148.082,147.32 BJT1.13@151.892,151.13
NetBJT1_14: BJT1.14 FOT3.1 R9T.2 | length 39.6
  Top Layer w0.3: FOT3.1@127.508,137.16 135.382,137.16 BJT1.14@149.352,151.13 149.352,154.915 150.876,156.439 R9T.2@150.876,162.433
NetBJT1_15: BJT1.15 FOT2.1 R8T.2 | length 58.6
  Top Layer w0.3: FOT2.1@127.508,127 123.444,131.064 123.444,146.685 125.569,148.81 127.943,148.81 128.739,149.606 143.661,149.606 143.837,149.43 145.112,149.43 BJT1.15@146.812,151.13 146.602,151.34 146.602,155.289 147.752,156.439 R8T.2@147.752,162.433
NetBJT1_16: BJT1.16 FOT1.1 R7T.2 | length 68.8
  Top Layer w0.3: FOT1.1@127.508,116.84 122.809,121.539 122.809,149.352 124.587,151.13 BJT1.16@144.272,151.13 144.272,152.767 143.376,153.663 143.376,155.289 144.526,156.439 R7T.2@144.526,162.433
NetC1G_1: C1G.1 CC1G.1 DCDC1.3 ISO1.8 | length 43
  Top Layer w1.5: DCDC1.3@61.595,187.198 C1G.1@61.595,207.899
  Bottom Layer w1.5: CC1G.1@55.499,216.154 61.468,210.185 C1G.1@61.468,208.026 65.708,208.026 ISO1.8@70.993,213.311
NetC2G_2: C2G.2 CC1G.2 DCDC1.1 ISO1.5 | length 64.8
  Top Layer w1.5: CC1G.2@55.499,221.154 57.277,219.376 57.277,217.976 57.299,217.954 57.299,215.408 54.656,212.765 54.656,207.275 56.515,205.416 DCDC1.1@56.515,187.198 ; C2G.2@62.818,218.567 70.311,211.074 76.382,211.074 77.873,212.565 77.873,212.571 ISO1.5@78.613,213.311
  Bottom Layer w1.5: CC1G.2@55.499,221.154 58.086,218.567 C2G.2@62.818,218.567
NetC2S_1: C2S.1 R7S.1 to_adc.2 ZD1S.2 | length 51.6
  Bottom Layer w0.3: to_adc.2@56.388,83.693 56.388,83.78 60.671,88.063 60.671,110.582 65.532,115.443 C2S.1@67.27,115.443 70.651,115.443 71.447,116.239 75.832,116.239 ZD1S.2@76.882,115.189 80.518,115.189 R7S.1@80.772,115.443
NetC3G_1: C3G.1 CC2G.1 DCDC2.3 ISO2.8 | length 44.8
  Top Layer w1.5: ISO2.8@85.217,213.184 CC2G.1@85.217,218.44 ; DCDC2.3@96.139,187.198 96.139,194.056 100.584,198.501 C3G.1@100.584,207.01
  Bottom Layer w1.5: ISO2.8@85.217,213.184 85.217,213.178 91.385,207.01 C3G.1@100.584,207.01
NetC3S_1: C3S.1 R10S.2 to_adc.6 ZD3S.2 | length 49.5
  Top Layer w0.3: C3S.1@67.27,104.076 69.718,104.076 70.832,102.963 75.832,102.963 ZD3S.2@76.882,104.013 77.009,104.14 R10S.2@80.772,104.14
  Bottom Layer w0.3: to_adc.6@56.388,73.533 60.833,77.978 60.833,87.376 64.897,91.44 64.897,101.703 C3S.1@67.27,104.076
NetC4G_2: C4G.2 CC2G.2 DCDC2.1 ISO2.5 | length 50.5
  Top Layer w1.5: CC2G.2@90.217,218.44 90.217,216.615 92.837,213.995 ISO2.5@92.837,213.184 95.758,210.263 95.758,201.676 91.08,196.998 91.08,187.219 DCDC2.1@91.059,187.198
  Bottom Layer w1.5: CC2G.2@90.217,218.44 99.361,227.584 C4G.2@101.426,227.584
NetC4S_1: C4S.1 R13S.2 to_adc.8 ZD4S.2 | length 48.8
  Top Layer w0.3: to_adc.8@56.388,68.453 64.135,76.2 64.135,95.258 C4S.1@67.27,98.393 70.429,98.393 71.447,97.375 75.832,97.375 ZD4S.2@76.882,98.425 76.945,98.489 R13S.2@80.772,98.489
NetC5G_1: C5G.1 CC3G.1 DCDC3.3 ISO3.8 | length 42.4
  Top Layer w1.5: CC3G.1@114.506,219.583 113.284,218.361 ISO3.8@113.284,215.724 113.284,214.376 120.269,207.391 121.666,207.391 122.554,206.503 122.554,205.106 130.683,196.977 135.509,196.977 DCDC3.3@140.081,192.405
NetC5S_1: C5S.1 C20S.1 O1.3 O4.3 O5.3 R17S.1 R18S.1 | length 86.3
  Top Layer w0.3: O1.3@105.029,110.49 107.188,110.49 110.109,107.569 C20S.1@114.721,107.569 115.697,107.569 O5.3@122.428,100.838 ; O4.3@156.083,110.49 158.496,112.903 158.496,116.586 154.94,120.142 R18S.1@154.94,121.92 R17S.1@154.94,126.619 158.583,126.619 C5S.1@158.623,126.579
  Bottom Layer w0.3: C20S.1@114.721,107.569 116.372,109.22 154.813,109.22 O4.3@156.083,110.49
NetC6G_2: C6G.2 CC3G.2 DCDC3.1 ISO3.5 | length 35.1
  Bottom Layer w1.5: CC3G.2@119.506,219.583 120.904,218.185 ISO3.5@120.904,215.724 128.62,215.724 132.127,212.217 132.127,207.852 140.081,199.898 DCDC3.1@140.081,197.485
NetC6S_1: C6S.1 R19S.1 to_adc.10 ZD5S.2 | length 48.2
  Top Layer w0.3: C6S.1@67.27,92.71 70.524,92.71 71.447,91.787 75.832,91.787 ZD5S.2@76.882,92.837 R19S.1@80.772,92.837
  Bottom Layer w0.3: to_adc.10@56.388,63.373 67.27,74.255 C6S.1@67.27,92.71
NetC7G_1: C7G.1 CC4G.1 DCDC4.3 ISO4.8 | length 54.6
  Bottom Layer w1.5: C7G.1@135.763,218.948 135.763,218.567 CC4G.1@144.526,209.804 148.922,214.2 ISO4.8@157.734,214.2 157.734,214.194 167.11,204.818 167.11,194.031 168.91,192.231 DCDC4.3@168.91,192.024
NetC8G_2: C8G.2 CC4G.2 DCDC4.1 ISO4.5 | length 49.9
  Top Layer w1.5: CC4G.2@139.526,209.804 141.98,209.804 143.78,211.604 145.183,211.604 152.273,218.694 C8G.2@153.59,218.694 154.94,218.694 157.784,215.85 163.497,215.85 165.147,214.2 ISO4.5@165.354,214.2
  Bottom Layer w1.5: ISO4.5@165.354,214.2 168.91,210.644 DCDC4.1@168.91,197.104
NetC8S_1: C8S.1 R25S.1 to_adc.4 ZD2S.2 | length 51.2
  Top Layer w0.3: to_adc.4@56.388,78.613 60.198,82.423 60.198,104.521 65.437,109.76 C8S.1@67.27,109.76 69.623,109.76 70.832,108.551 75.832,108.551 ZD2S.2@76.882,109.601 77.072,109.791 R25S.1@80.772,109.791
NetC9G_1: C9G.1 CC5G.1 DCDC5.3 ISO5.8 | length 44.6
  Bottom Layer w1.5: C9G.1@169.291,218.948 171.45,216.789 CC5G.1@182.626,216.789 182.626,215.978 ISO5.8@184.912,213.692 180.975,209.755 180.975,199.263 DCDC5.3@188.214,192.024
NetC10G_2: C10G.2 CC5G.2 DCDC5.1 ISO5.5 | length 44
  Top Layer w1.5: CC5G.2@182.626,221.789 178.736,217.899 C10G.2@178.736,205.74 187.372,197.104 DCDC5.1@188.214,197.104
  Bottom Layer w1.5: CC5G.2@182.626,221.789 188.515,215.9 190.324,215.9 ISO5.5@192.532,213.692
NetC11G_1: C11G.1 CC6G.1 DCDC6.3 ISO6.8 | length 47.5
  Top Layer w1.5: ISO6.8@198.12,213.692 198.12,213.686 205.558,206.248 CC6G.1@210.058,206.248 214.122,210.312 217.932,210.312 C11G.1@221.107,207.137
  Bottom Layer w1.5: DCDC6.3@216.916,191.516 218.694,191.516 221.107,193.929 C11G.1@221.107,207.137
NetC12G_2: C12G.2 CC6G.2 DCDC6.1 ISO6.5 | length 38.1
  Bottom Layer w1.5: ISO6.5@205.74,213.692 207.614,213.692 CC6G.2@215.058,206.248 ; DCDC6.1@216.916,196.596 216.916,204.39 CC6G.2@215.058,206.248 ; C12G.2@221.535,218.821 215.058,212.344 CC6G.2@215.058,206.248
Netfor1_1: for1.1 for1.4 H1G.1A | length 57.3
  Bottom Layer w0.3: for1.1@63.754,121.92 63.754,122.975 65.024,124.245 65.024,127.83 63.754,129.1 for1.4@63.754,129.54 60.071,133.223 60.071,165.442 63.319,168.69 64.55,168.69 65.405,169.545 H1G.1A@69.596,169.545
Netfor2_1: for2.1 for2.4 H1G.2A | length 39.7
  Bottom Layer w0.3: for2.1@63.754,132.08 63.754,133.135 62.704,134.185 62.704,138.21 63.754,139.26 for2.4@63.754,139.7 61.087,142.367 61.087,159.131 63.466,161.51 64.189,161.51 67.144,164.465 H1G.2A@69.596,164.465
Netfor3_1: for3.1 for3.4 H1G.3A | length 20.9
  Bottom Layer w0.3: for3.1@63.754,142.24 63.754,142.875 62.103,144.526 62.103,148.209 for3.4@63.754,149.86 67.876,153.982 67.876,157.665 H1G.3A@69.596,159.385
Netfor4_1: for4.1 for4.4 H1G.4A | length 23.8
  Top Layer w0.3: for4.1@63.754,152.4 69.86,152.4 74.305,156.845 H1G.4A@77.216,156.845
  Bottom Layer w0.3: for4.1@63.754,152.4 63.754,153.455 62.704,154.505 62.704,158.53 63.754,159.58 for4.4@63.754,160.02
Netfor5_1: for5.1 for5.4 H1G.5A | length 28.5
  Top Layer w0.3: for5.4@63.754,170.18 63.754,169.74 64.804,168.69 64.804,164.665 63.754,163.615 for5.1@63.754,162.56 67.876,158.438 67.876,156.396 68.512,155.76 70.68,155.76 76.845,161.925 H1G.5A@77.216,161.925
Netfor6_1: for6.1 for6.4 H1G.6A | length 25.2
  Bottom Layer w0.3: for6.4@63.754,180.34 61.595,178.181 61.595,174.879 for6.1@63.754,172.72 71.501,172.72 H1G.6A@77.216,167.005
NetFUSE1_1: FUSE1.1 FUSE2.1 FUSE3.1 R1S.1 vac_in.1 | length 86.2
  Top Layer w0.3: R1S.1@270.51,81.661 278.513,89.664 FUSE3.1@278.513,94.615
  Top Layer w1: FUSE1.1@285.623,117.983 285.623,84.074 vac_in.1@296.037,73.66
  Bottom Layer w1: FUSE3.1@278.513,94.615 FUSE3.1@285.623,94.615 ; FUSE2.1@278.513,106.299 FUSE2.1@285.623,106.299 ; FUSE1.1@278.513,117.983 FUSE1.1@285.623,117.983
NetFUSE1_2: FUSE1.2 PS1.ACL | length 129.6
  Bottom Layer w1: PS1.ACL@166.141,87.666 166.141,87.92 170.114,83.947 238.506,83.947 251.206,96.647 251.206,100.203 252.73,101.727 253.873,101.727 270.129,117.983 FUSE1.2@262.623,117.983
NetFUSE2_2: FUSE2.2 PS2.2 | length 59.9
  Top Layer w1: PS2.2@223.215,133.025 233.431,122.809 241.046,122.809 247.65,116.205 255.717,116.205 262.702,109.22 262.702,106.378 FUSE2.2@262.623,106.299 ; FUSE2.2@262.359,106.553 FUSE2.2@262.359,107.305
  Bottom Layer w1: FUSE2.2@262.623,106.299 FUSE2.2@269.469,106.299
NetFUSE3_2: FUSE3.2 PS3.1 | length 112.5
  Top Layer w1: FUSE3.2@262.623,94.615 FUSE3.2@269.733,94.615
  Bottom Layer w1: PS3.1@236.601,134.279 242.483,128.397 288.163,128.397 289.56,127 289.56,103.505 287.02,100.965 271.973,100.965 269.733,98.725 FUSE3.2@269.733,94.615
NetGATE1_2: GATE1.2 R1G.2 ZD1G.1 | length 14.1
  Top Layer w1.5: R1G.2@66.829,230.532 66.983,230.378 GATE1.2@72.724,230.378 74.295,228.807 ZD1G.1@74.295,222.885
NetGATE2_2: GATE2.2 R2G.2 ZD3G.1 | length 20.9
  Top Layer w1.5: GATE2.2@85.805,230.378 85.805,230.298 R2G.2@92.202,223.901 97.663,223.901 ZD3G.1@102.108,219.456
NetGATE3_2: GATE3.2 R3G.2 ZD5G.1 | length 30.2
  Top Layer w1.5: R3G.2@121.539,228.044 124.285,228.044 ZD5G.1@125.857,229.616 127.657,227.816 146.743,227.816 GATE3.2@149.305,230.378
NetGATE4_2: GATE4.2 R4G.2 ZD7G.1 | length 42.7
  Top Layer w1.5: ZD7G.1@149.098,204.47 151.384,206.756 162.56,206.756 168.021,212.217 168.021,214.884 164.592,218.313 164.592,223.828 162.259,226.161 GATE4.2@162.259,230.378
NetGATE5_2: GATE5.2 R5G.2 ZD9G.1 | length 52.4
  Bottom Layer w1.5: ZD9G.1@185.801,229.489 188.341,229.489 192.532,225.298 203.327,225.298 R5G.2@207.264,229.235 233.252,229.235 GATE5.2@234.395,230.378
NetGATE6_2: GATE6.2 R6G.2 ZD11G.1 | length 54
  Top Layer w1.5: ZD11G.1@201.422,217.932 204.47,217.932 211.201,224.663 225.933,224.663 R6G.2@228.219,222.377 241.046,222.377 247.349,228.68 GATE6.2@247.349,230.378
NetH1G_1Y: H1G.1Y ISO1.2 | length 38.4
  Top Layer w0.3: H1G.1Y@69.596,167.005 69.595,167.005 67.876,168.724 67.876,196.654 ISO1.2@73.533,202.311
NetH1G_2Y: H1G.2Y ISO2.2 | length 47.8
  Top Layer w0.3: H1G.2Y@69.596,161.925 72.898,165.227 72.898,187.325 ISO2.2@87.757,202.184
NetH1G_3Y: H1G.3Y ISO3.2 | length 71
  Top Layer w0.3: H1G.3Y@69.596,156.845 69.596,157.216 71.316,158.936 71.316,161.613 74.168,164.465 74.168,169.926 87.757,183.515 94.615,183.515 ISO3.2@115.824,204.724
NetH1G_4Y: H1G.4Y ISO4.2 | length 103.6
  Bottom Layer w0.3: H1G.4Y@77.216,154.305 110.578,154.305 126.458,170.185 126.458,170.615 127.073,171.23 128.304,171.23 ISO4.2@160.274,203.2
NetH1G_5Y: H1G.5Y ISO5.2 | length 153.7
  Bottom Layer w0.3: H1G.5Y@77.216,159.385 75.496,157.665 75.496,153.22 76.581,152.135 111.495,152.135 120.87,161.51 127.943,161.51 135.47,169.037 171.577,169.037 191.135,188.595 191.135,199.009 ISO5.2@187.452,202.692
NetH1G_6Y: H1G.6Y ISO6.2 | length 173.5
  Bottom Layer w0.3: H1G.6Y@77.216,164.465 73.787,161.036 73.787,153.797 76.234,151.35 132.427,151.35 139.7,158.623 177.546,158.623 200.66,181.737 ISO6.2@200.66,202.692
NetHT1_1Y: HT1.1Y R1T.1 | length 80.5
  Bottom Layer w0.3: HT1.1Y@69.723,135.382 73.406,131.699 123.102,131.699 127.073,135.67 127.943,135.67 131.914,131.699 R1T.1@145.415,131.699
NetHT1_2Y: HT1.2Y R2T.1 | length 91.5
  Top Layer w0.3: HT1.2Y@69.723,130.302 75.174,130.302 76.629,128.847 79.063,128.847 91.613,116.297 118.946,116.297 119.453,115.79 132.732,115.79 R2T.1@148.641,131.699